# EAGLE board FAJAS_V3 (EAGLE 9.6.2)
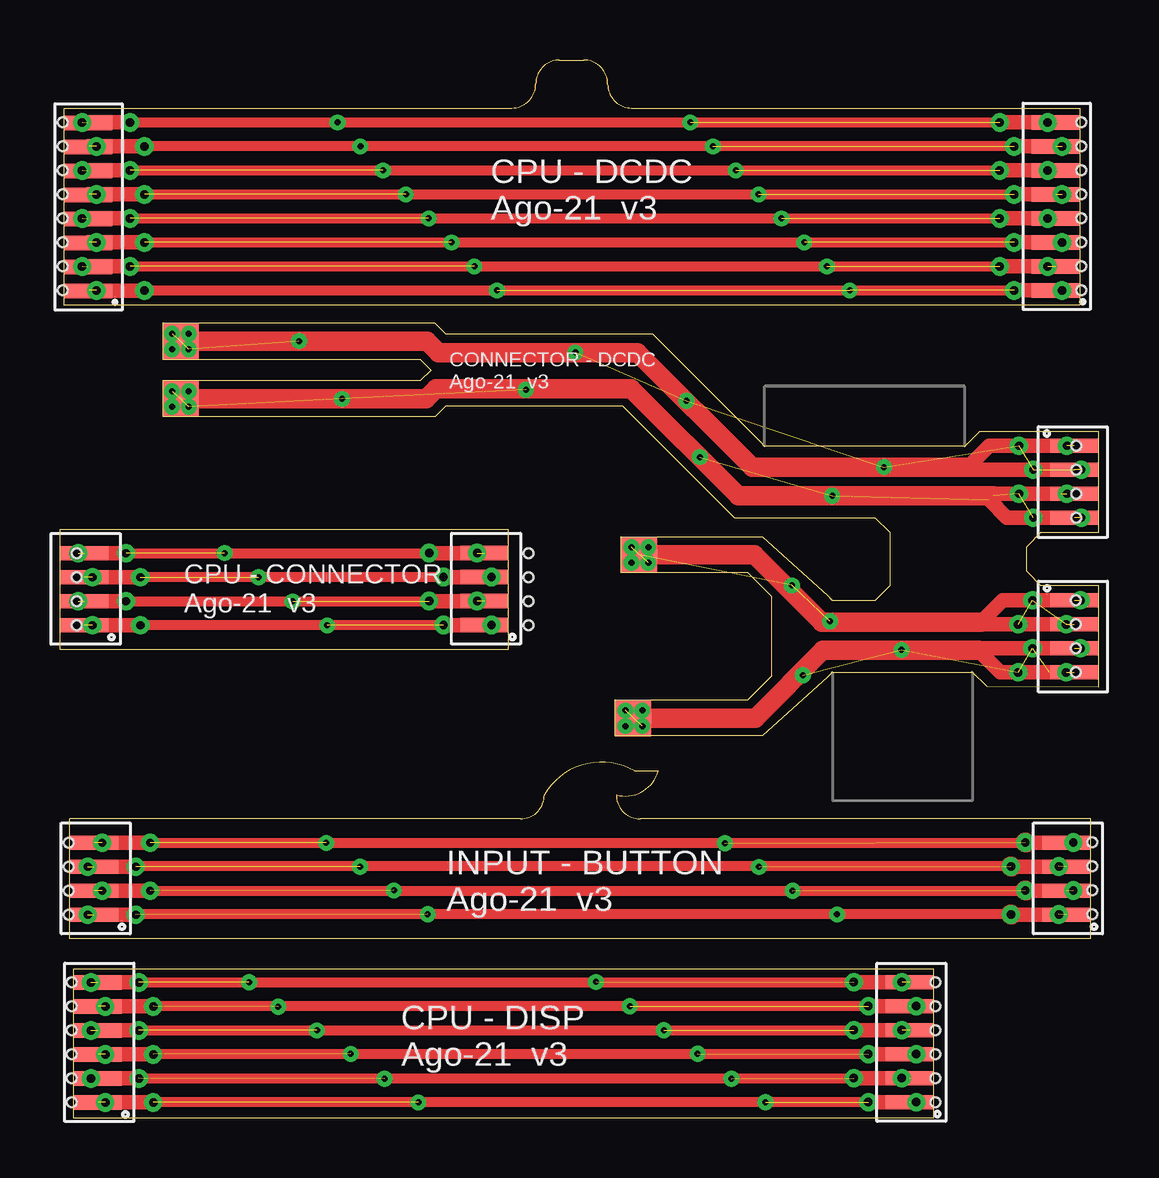
[diagram p0: board, top side]
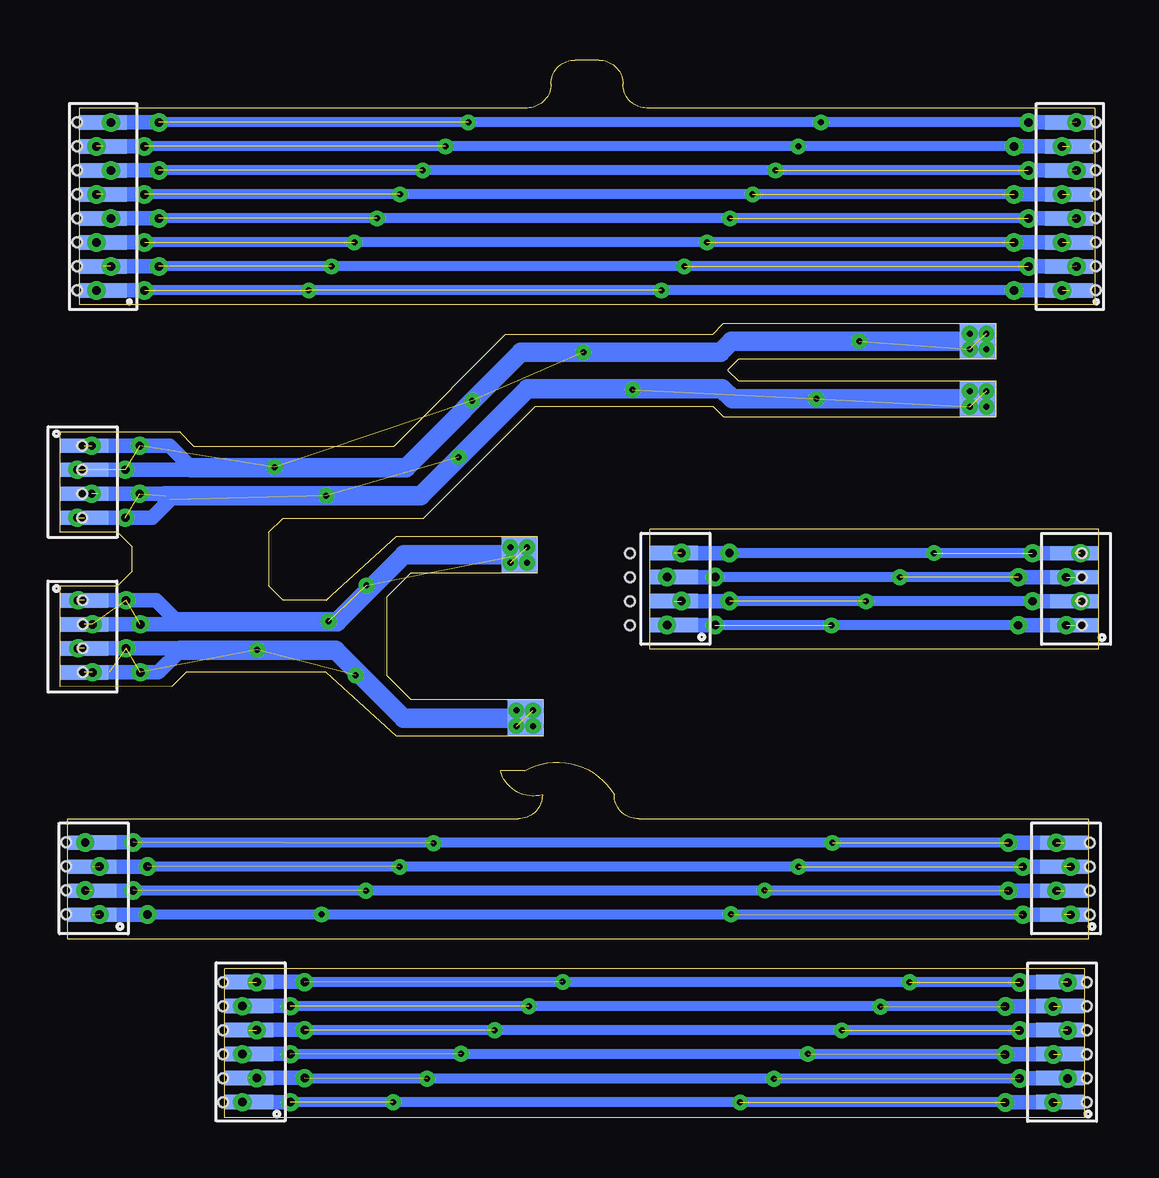
[diagram p1: board, bottom side, seen from below]

Size 43.3 x 44.07 mm. Coordinates in mm from the lower left corner, seen from the top.
Outline: 31.98,21.77 32.19,21.56
Outline: 32.19,21.56 33.99,21.56 34.59,22.16 34.59,24.39 33.99,24.99 28.13,24.99 23.47,29.65 16.08,29.65 15.63,29.2 4.28,29.2 4.28,30.7 15.01,30.7 15.46,31.15 15.01,31.6 4.28,31.6 4.28,33.1 15.63,33.1 16.08,32.65 24.71,32.65 29.23,28.13 29.37,27.99 37.71,27.99 38.31,28.59 43.29,28.59 43.29,24.39 40.89,24.39 40.29,23.79 40.29,22.76 40.89,22.16 43.29,22.16 43.29,17.96 38.62,17.97 38.02,18.57 32.19,18.56 31.98,18.35 29.29,15.91 23.13,15.91 23.13,17.41 28.67,17.41 29.67,18.41 29.67,21.71 28.67,22.71 23.38,22.71 23.38,24.21 29.29,24.21 31.98,21.77
Outline: 32.19,21.56 32.18,21.56 31.98,21.77
Outline: 42.97,7.45 42.97,12.45 24.19,12.45 arc-90 23.19,13.45 arc90 24.94,14.45 23.94,14.45 arc90 20.19,13.45 arc-90 19.19,12.45 0.41,12.45 0.41,7.45 42.97,7.45
Outline: 0,19.51 0,24.51 18.7,24.51 18.7,19.51 0,19.51
Outline: 0.16,33.87 42.5,33.87 42.5,42.07 23.83,42.07 arc-90 22.83,43.07 arc90 21.83,44.07 20.83,44.07 arc90 19.83,43.07 arc-90 18.83,42.07 0.16,42.07 0.16,33.87
Outline: 0.57,6.2 36.43,6.2 36.43,0 0.57,0 0.57,6.2
Copper layers (1*16): Top 0.035mm / dielectric 1.5mm / Bottom 0.035mm
Design rules "default *": minimum track width 6mil, minimum drill 0.25mm, track to track 10mil, track to pad 10mil, pad to pad 10mil, via to via 1mil, smd to smd 6mil, copper to edge 0mil, drill to drill 6mil, minimum pad ring 10mil, minimum via ring 8mil, stop-mask expansion 4mil, vias tented up to drill 50mil, thermal gap 10mil
Net classes: 1 power: width 0.178 mm; 2 gnd: width 0.305 mm, drill 0.483 mm, clearance 0.203 mm
Holes 0.4 mm at 0.7,23.52 0.7,22.52 0.7,21.52 0.7,20.52 0.12,41.47 0.12,40.47 0.12,39.47 0.12,38.47 0.12,37.47 0.12,36.47 0.12,35.47 0.12,34.47 42.57,38.47 42.57,39.47 42.57,40.47 42.57,41.47 42.57,34.47 42.57,35.47 42.57,36.47 42.57,37.47 42.34,21.56 42.34,20.56 42.34,19.56 42.34,18.56 42.37,25 42.37,26 42.37,27 42.37,28 43.04,11.47 43.04,10.47 43.04,9.47 43.04,8.47 0.36,8.46 0.36,9.46 0.36,10.46 0.36,11.46 0.49,5.64 0.49,4.64 0.49,3.64 0.49,2.64 0.49,1.64 0.49,0.64 36.49,0.65 36.49,1.65 36.49,2.65 36.49,3.65 36.49,4.65 36.49,5.65 19.54,20.53 19.54,21.53 19.54,22.53 19.54,23.53

## Footprints (pad centres in the part's own frame; a part is rotated, then mirrored left to right if it is on the bottom)
FLEX6 = smd 0.6 x 2: 1 -2.5,0.25; 2 -1.5,0.25; 3 -0.5,0.25; 4 0.5,0.25; 5 1.5,0.25; 6 2.5,0.25
FLEX4 = smd 0.6 x 2: 1 -3.77,1.52; 2 -2.77,1.52; 3 -1.77,1.52; 4 -0.77,1.52
TESTPAD_TP15SQ = smd 1.5 x 1.5: TP 0,0
FLEX8 = smd 0.6 x 2: 1 -3.5,0.25; 2 -2.5,0.25; 3 -1.5,0.25; 4 -0.5,0.25; 5 0.5,0.25; 6 1.5,0.25; 7 2.5,0.25; 8 3.5,0.25

## Placement (x,y rotation side)
DISP_CPU_1  DISP_CPU_1  [FLEX6]  35.67,3.15 90 top
DISP_CPU_2  DISP_CPU_2  [FLEX6]  1.83,3.14 90 top
DISP_CPU_3  DISP_CPU_2  [FLEX6]  1.34,3.15 90 bottom
DISP_CPU_4  DISP_CPU_1  [FLEX6]  35.16,3.16 90 bottom
FLX1  FLEX4  [FLEX4]  43.47,12.23 90 top
FLX2  FLEX4  [FLEX4]  43.8,24.23 270 bottom
FLX3  FLEX4  [FLEX4]  19.22,24.3 90 top
FLX4  FLEX4  [FLEX4]  40.77,24.23 270 top
FLX5  FLEX4  [FLEX4]  40.77,17.79 270 top
FLX6  FLEX4  [FLEX4]  2.95,12.23 90 top
FLX7  FLEX4  [FLEX4]  43.81,17.79 270 bottom
FLX8  FLEX4  [FLEX4]  40.43,12.23 90 bottom
FLX9  FLEX4  [FLEX4]  -0.1,12.23 90 bottom
FLX10  FLEX4  [FLEX4]  -0.52,24.29 90 bottom
FLX11  FLEX4  [FLEX4]  16.18,24.3 90 bottom
GND1  TESTPAD_TPSQTP15SQ  [TESTPAD_TP15SQ]  24.14,23.46 0 bottom
GND2  TESTPAD_TPSQTP15SQ  [TESTPAD_TP15SQ]  24.14,23.45 0 top
K1  FLEX_DCDC  [FLEX8]  0.97,37.97 90 bottom
K2  FLEX_DCDC  [FLEX8]  1.42,37.95 90 top
K3  FLEX_CONN  [FLEX4]  2.52,24.29 90 top
K4  FLEX8  [FLEX8]  41.77,37.97 90 top
K5  FLEX8  [FLEX8]  41.27,37.97 90 bottom
VO+  TESTPAD_TPSQTP15SQ  [TESTPAD_TP15SQ]  5.03,32.34 0 top
VO+1  TESTPAD_TPSQTP15SQ  [TESTPAD_TP15SQ]  5.03,32.35 0 bottom
VO-  TESTPAD_TPSQTP15SQ  [TESTPAD_TP15SQ]  5.03,29.95 0 top
VO-1  TESTPAD_TPSQTP15SQ  [TESTPAD_TP15SQ]  5.03,29.95 0 bottom
VSYS_IP  TESTPAD_TPSQTP15SQ  [TESTPAD_TP15SQ]  23.89,16.65 0 top
VSYS_IP1  TESTPAD_TPSQTP15SQ  [TESTPAD_TP15SQ]  23.89,16.65 0 bottom

## Library data of the parts
DISP_CPU_1-DISP_CPU_4 K1 K2 K4 K5 = Flex_Faja_connector
FLX1-FLX11 K3 = Flex4
GND1 GND2 VO+ VO+1 VO- VO-1 VSYS_IP VSYS_IP1 = BeagleBone_Blue_R3

## Nets
BUTTON-INPUT_1: FLX1.1 FLX6.1 FLX8.1 FLX9.1
BUTTON-INPUT_2: FLX1.2 FLX6.2 FLX8.2 FLX9.2
BUTTON-INPUT_3: FLX1.3 FLX6.3 FLX8.3 FLX9.3
BUTTON-INPUT_4: FLX1.4 FLX6.4 FLX8.4 FLX9.4
CPU-CONN_1: FLX3.1 FLX10.1 FLX11.1 K3.1
CPU-CONN_2: FLX3.2 FLX10.2 FLX11.2 K3.2
CPU-CONN_3: FLX3.3 FLX10.3 FLX11.3 K3.3
CPU-CONN_4: FLX3.4 FLX10.4 FLX11.4 K3.4
CPU-DCDC_1: K1.1 K2.1 K4.1 K5.1
CPU-DCDC_2: K1.2 K2.2 K4.2 K5.2
CPU-DCDC_3: K1.3 K2.3 K4.3 K5.3
CPU-DCDC_4: K1.4 K2.4 K4.4 K5.4
CPU-DCDC_5: K1.5 K2.5 K4.5 K5.5
CPU-DCDC_6: K1.6 K2.6 K4.6 K5.6
CPU-DCDC_7: K1.7 K2.7 K4.7 K5.7
CPU-DCDC_8: K1.8 K2.8 K4.8 K5.8
DSP-CPU_1: DISP_CPU_1.1 DISP_CPU_2.1 DISP_CPU_3.1 DISP_CPU_4.1
DSP-CPU_2: DISP_CPU_1.2 DISP_CPU_2.2 DISP_CPU_3.2 DISP_CPU_4.2
DSP-CPU_3: DISP_CPU_1.3 DISP_CPU_2.3 DISP_CPU_3.3 DISP_CPU_4.3
DSP-CPU_4: DISP_CPU_1.4 DISP_CPU_2.4 DISP_CPU_3.4 DISP_CPU_4.4
DSP-CPU_5: DISP_CPU_1.5 DISP_CPU_2.5 DISP_CPU_3.5 DISP_CPU_4.5
DSP-CPU_6: DISP_CPU_1.6 DISP_CPU_2.6 DISP_CPU_3.6 DISP_CPU_4.6
GND: FLX5.1 FLX5.2 FLX7.1 FLX7.2 GND1.TP GND2.TP
VOUT+: FLX2.1 FLX2.2 FLX4.1 FLX4.2 VO+1.TP VO+.TP
VOUT-: FLX2.3 FLX2.4 FLX4.3 FLX4.4 VO-1.TP VO-.TP
VSYS: FLX5.3 FLX5.4 FLX7.3 FLX7.4 VSYS_IP1.TP VSYS_IP.TP

## Tracks (layer width: path | path; a pad name or v marks a point on that pad's centre or on a via)
BUTTON-INPUT_1  (via drill 0.25, 0.35)  (3 unrouted)
  Top 0.406: v39.64,8.47 v32.39,8.47 v3.17,8.47 v3.16,8.46
  Top 0.61: FLX8.1 39.65,8.46 | FLX9.1 v3.16,8.46
  Top 0.813: 39.65,8.46 v39.64,8.47
  Bottom 0.406: v39.64,8.47 v32.39,8.47 v3.17,8.47 v3.16,8.46
  Bottom 0.61: FLX9.1 v3.16,8.46 | FLX8.1 v39.65,8.46 v39.64,8.47
  other vias: 41.64,8.47 1.16,8.46 15.33,8.48
BUTTON-INPUT_2  (via drill 0.25, 0.35)  (4 unrouted)
  Top 0.406: v3.76,9.46 v40.25,9.46 40.25,9.46
  Top 0.61: FLX8.2 40.25,9.46 | FLX9.2 v3.76,9.46
  Top 0.813: 40.25,9.46 v40.24,9.47
  Bottom 0.406: v3.76,9.46 v40.25,9.46
  Bottom 0.61: FLX9.2 v3.76,9.46 | FLX8.2 v40.25,9.46 v40.24,9.47
  other vias: 30.54,9.46 42.24,9.47 1.76,9.46 13.92,9.47
BUTTON-INPUT_3  (via drill 0.25, 0.35)  (4 unrouted)
  Top 0.406: v39.64,10.47 v3.17,10.47 v3.16,10.46
  Top 0.61: FLX8.3 39.65,10.46 | FLX9.3 v3.16,10.46
  Top 0.813: 39.65,10.46 v39.64,10.47
  Bottom 0.406: v39.64,10.47 v3.17,10.47 v3.16,10.46
  Bottom 0.61: FLX9.3 v3.16,10.46 | FLX8.3 v39.65,10.46 v39.64,10.47
  other vias: 41.64,10.47 1.16,10.46 29.13,10.45 12.51,10.46
BUTTON-INPUT_4  (via drill 0.25, 0.35)  (4 unrouted)
  Top 0.406: v3.76,11.46 v40.25,11.46 40.25,11.46
  Top 0.61: FLX8.4 40.25,11.46 | FLX9.4 v3.76,11.46
  Top 0.813: 40.25,11.46 v40.24,11.47
  Bottom 0.406: v3.76,11.46 v40.23,11.46 v40.24,11.47
  Bottom 0.61: FLX9.4 v3.76,11.46 | v40.24,11.47 v42.24,11.47
  other vias: 1.76,11.46 11.1,11.45 27.72,11.44
CPU-CONN_1  (via drill 0.25, 0.35)  (3 unrouted)
  Top 0.406: v15.99,20.53 3.36,20.53 v3.35,20.52
  Top 0.508: FLX10.1
  Top 0.61: FLX10.1 v3.35,20.52 | FLX11.1 v15.99,20.53
  Bottom 0.406: 3.39,20.52 FLX11.1
  Bottom 0.61: FLX10.1 3.39,20.52 | v15.99,20.53 v17.99,20.53
  other vias: 1.35,20.52 11.14,20.51
CPU-CONN_2  (via drill 0.25, 0.35)  (3 unrouted)
  Top 0.406: v2.75,21.52 15.38,21.52 v15.39,21.53
  Top 0.61: FLX10.2 v2.75,21.52 | FLX11.2 v15.39,21.53
  Bottom 0.406: 2.79,21.52 17.42,21.52 FLX11.2
  Bottom 0.61: FLX10.2 2.79,21.52 | v15.39,21.53 17.41,21.53 17.42,21.52
  other vias: 17.39,21.53 0.75,21.52 9.7,21.51
CPU-CONN_3  (via drill 0.25, 0.35)  (3 unrouted)
  Top 0.406: v15.99,22.53 3.36,22.53 v3.35,22.52
  Top 0.508: FLX10.3
  Top 0.61: FLX10.3 v3.35,22.52 | FLX11.3 v15.99,22.53
  Bottom 0.406: 3.47,22.52 FLX11.3
  Bottom 0.61: FLX10.3 3.47,22.52 | v15.99,22.53 v17.99,22.53
  other vias: 1.35,22.52 8.28,22.52
CPU-CONN_4  (via drill 0.25, 0.35)  (4 unrouted)
  Top 0.406: v2.75,23.52 15.38,23.52 v15.39,23.53
  Top 0.61: FLX10.4 v2.75,23.52 | v15.39,23.53 v17.39,23.53
  Bottom 0.406: v2.75,23.52 17.36,23.52 18.33,23.52 18.39,23.58
  Bottom 0.61: FLX10.4 v2.75,23.52 | v15.39,23.53 17.35,23.53 17.36,23.52
  other vias: 0.75,23.52 6.86,23.53
CPU-DCDC_1  (via drill 0.25, 0.35)  (3 unrouted)
  Top 0.406: 1.17,34.47 K2.1 | v3.52,34.47 v39.77,34.47
  Top 0.61: K2.1 3.52,34.45 v3.52,34.47 | v39.77,34.47 K5.1
  Bottom 0.406: K1.1 1.67,34.47 v39.77,34.47 v41.77,34.47
  Bottom 0.61: v3.52,34.47 1.67,34.47 | K5.1 v39.77,34.47
  other vias: 1.52,34.47 18.22,34.47 32.92,34.47
CPU-DCDC_2  (via drill 0.25, 0.35)  (5 unrouted)
  Top 0.406: 41.52,35.45 K5.2 | v2.92,35.47 39.62,35.47
  Top 0.61: K2.2 1.17,35.47 v2.92,35.47 | v39.17,35.47 39.62,35.47 v41.17,35.47
  Bottom 0.406: 2.97,35.47 v39.17,35.47
  Bottom 0.61: K1.2 2.97,35.47 | v39.17,35.47 v41.17,35.47
  other vias: 0.92,35.47 17.27,35.47 31.97,35.47
CPU-DCDC_3  (via drill 0.25, 0.35)  (3 unrouted)
  Top 0.406: 1.17,36.47 K2.3 | v3.52,36.47 v39.77,36.47
  Top 0.61: K2.3 1.17,36.47 v3.52,36.47 | v39.77,36.47 K5.3
  Bottom 0.406: K1.3 v39.77,36.47 v41.77,36.47
  Bottom 0.61: v3.52,36.47 K1.3 | K5.3 v39.77,36.47
  other vias: 1.52,36.47 16.32,36.47 31.02,36.47
CPU-DCDC_4  (via drill 0.25, 0.35)  (4 unrouted)
  Top 0.406: 41.52,37.45 K5.4 | v2.92,37.47 v39.17,37.47
  Top 0.61: K2.4 1.17,37.47 v2.92,37.47 | v39.17,37.47 v41.17,37.47
  Bottom 0.406: 3.07,37.47 v39.17,37.47 | 41.22,37.47 K5.4
  Bottom 0.61: K1.4 3.07,37.47 | v39.17,37.47 41.22,37.47
  other vias: 0.92,37.47 15.37,37.47 30.07,37.47
CPU-DCDC_5  (via drill 0.25, 0.35)  (4 unrouted)
  Top 0.406: 1.17,38.47 K2.5 | v3.52,38.47 v39.77,38.47
  Top 0.61: K2.5 1.17,38.47 v3.52,38.47 | v39.77,38.47 K5.5
  Bottom 0.406: K1.5 1.57,38.47 v39.77,38.47
  Bottom 0.61: v3.52,38.47 1.57,38.47 | K5.5 v39.77,38.47
  other vias: 1.52,38.47 41.77,38.47 14.42,38.47 29.12,38.47
CPU-DCDC_6  (via drill 0.25, 0.35)  (4 unrouted)
  Top 0.406: v2.92,39.47 39.52,39.47
  Top 0.61: K2.6 1.17,39.47 v2.92,39.47 | v39.17,39.47 39.52,39.47 v41.17,39.47
  Bottom 0.406: 2.97,39.47 v39.17,39.47 | 41.22,39.47 K5.6
  Bottom 0.61: K1.6 2.97,39.47 | v39.17,39.47 41.22,39.47
  other vias: 0.92,39.47 13.47,39.47 28.17,39.47
CPU-DCDC_7  (via drill 0.25, 0.35)  (3 unrouted)
  Top 0.406: 1.17,40.47 K2.7 | v3.52,40.47 v12.52,40.47 v39.77,40.47
  Top 0.61: K2.7 1.17,40.47 v3.52,40.47 | v39.77,40.47 K5.7
  Bottom 0.406: 3.62,40.47 v39.77,40.47
  Bottom 0.61: K1.7 3.62,40.47 | K5.7 v39.77,40.47
  other vias: 1.52,40.47 41.77,40.47 27.22,40.47
CPU-DCDC_8  (via drill 0.25, 0.35)  (3 unrouted)
  Top 0.406: 41.52,41.45 K5.8 | v2.92,41.47 v11.57,41.47 v39.17,41.47
  Top 0.61: K2.8 1.17,41.47 v2.92,41.47 | v39.17,41.47 v41.17,41.47
  Bottom 0.406: 2.97,41.47 v39.17,41.47 | 41.27,41.47 K5.8
  Bottom 0.61: K1.8 2.97,41.47 | v39.17,41.47 41.27,41.47
  other vias: 0.92,41.47 26.27,41.47
DSP-CPU_1  (via drill 0.25, 0.35)  (4 unrouted)
  Top 0.406: v33.69,0.65 3.91,0.65 v3.89,0.64
  Top 0.61: DISP_CPU_2.1 v3.89,0.64 | v33.69,0.65 v35.69,0.65
  Bottom 0.406: v3.89,0.64 33.68,0.64 v33.69,0.65
  Bottom 0.61: DISP_CPU_3.1 3.88,0.65 v3.89,0.64 | DISP_CPU_4.1 v33.69,0.65
  other vias: 1.89,0.64 14.94,0.64 29.4,0.65
DSP-CPU_2  (via drill 0.25, 0.35)  (3 unrouted)
  Top 0.406: v3.29,1.64 33.08,1.64 v33.09,1.65
  Top 0.61: DISP_CPU_2.2 v3.29,1.64 | v33.09,1.65 v35.09,1.65
  Bottom 0.406: v33.09,1.65 33.08,1.64 v1.29,1.64
  Bottom 0.61: DISP_CPU_3.2 3.28,1.65 v3.29,1.64 | DISP_CPU_4.2 v33.1,1.66 v33.09,1.65
  other vias: 27.99,1.63 13.53,1.62
DSP-CPU_3  (via drill 0.25, 0.35)  (4 unrouted)
  Top 0.406: v33.69,2.65 3.91,2.65 v3.89,2.64
  Top 0.61: DISP_CPU_2.3 v3.89,2.64 | v33.69,2.65 v35.69,2.65
  Bottom 0.406: v3.89,2.64 33.68,2.64 v33.7,2.66
  Bottom 0.61: DISP_CPU_3.3 3.88,2.65 v3.89,2.64 | DISP_CPU_4.3 v33.7,2.66 v33.69,2.65
  other vias: 1.89,2.64 12.12,2.66 26.58,2.67
DSP-CPU_4  (via drill 0.25, 0.35)  (4 unrouted)
  Top 0.406: v3.29,3.64 33.08,3.64 v33.09,3.65
  Top 0.61: DISP_CPU_2.4 v3.29,3.64 | v33.09,3.65 DISP_CPU_1.4
  Bottom 0.406: DISP_CPU_4.4 3.29,3.66 3.28,3.65
  Bottom 0.61: DISP_CPU_3.4 3.28,3.65 v3.29,3.64 | DISP_CPU_4.4 v33.1,3.66 v33.09,3.65
  other vias: 1.29,3.64 35.09,3.65 25.17,3.65 10.71,3.64
DSP-CPU_5  (via drill 0.25, 0.35)  (4 unrouted)
  Top 0.406: v33.69,4.65 3.6,4.65 3.58,4.64
  Top 0.61: DISP_CPU_2.5 3.58,4.64 v3.89,4.64 | v33.69,4.65 v35.69,4.65
  Bottom 0.406: v3.89,4.64 33.68,4.64 v33.7,4.66
  Bottom 0.61: DISP_CPU_3.5 3.88,4.65 v3.89,4.64 | DISP_CPU_4.5 v33.7,4.66 v33.69,4.65
  other vias: 1.89,4.64 9.1,4.63 23.75,4.65
DSP-CPU_6  (via drill 0.25, 0.35)  (4 unrouted)
  Top 0.406: v3.29,5.64 33.08,5.64 v33.09,5.65
  Top 0.61: DISP_CPU_2.6 v3.29,5.64 | v33.09,5.65 DISP_CPU_1.6
  Bottom 0.406: DISP_CPU_3.6 v33.09,5.65 v33.1,5.66
  Bottom 0.61: DISP_CPU_3.6 3.28,5.65 v3.29,5.64 | DISP_CPU_4.6 v33.1,5.66 v33.09,5.65
  other vias: 1.29,5.64 35.09,5.65 7.88,5.65 22.34,5.66
GND  (via drill 0.25, 0.35)  (7 unrouted)
  Top 0.61: FLX7.1 39.29,21.56 38.38,20.65 38.33,20.6 38.37,20.56 FLX7.2
  Top 0.813: GND1.TP 28.96,23.45 31.76,20.65 38.38,20.65
  Bottom 0.61: FLX7.1 39.28,21.56 38.39,20.67 38.5,20.56 FLX7.2
  Bottom 0.813: GND1.TP 28.96,23.46 31.75,20.67 38.39,20.67
  other vias: 42.54,21.56 40.54,21.56 41.94,20.56 39.94,20.56 30.51,22.18 32.1,20.69
VOUT+  (via drill 0.25, 0.35)  (11 unrouted)
  Top 0.61: FLX2.1 38.75,28 37.85,27.1 37.74,26.99 FLX2.2
  Top 0.813: VO+1.TP 15.31,32.34 15.77,31.88 24.08,31.88 28.86,27.1 37.85,27.1
  Bottom 0.61: FLX2.1 38.73,28 37.82,27.09 37.91,27 FLX2.2
  Bottom 0.813: VO+1.TP 15.3,32.35 15.76,31.89 24.07,31.89 28.87,27.09 37.82,27.09
  other vias: 4.67,32.67 5.37,32.02 41.97,28 39.97,28 42.57,27 40.57,27 9.97,32.36 21.48,31.89 26.11,29.87 34.35,27.11
VOUT+1  (via drill 0.25)
  other vias: 5.37,32.67
VOUT+2  (via drill 0.25)
  other vias: 4.67,32.02
VOUT+3  (via drill 0.25)  (1 unrouted)
  other vias: 23.82,23.77 24.52,23.12
VOUT+4  (via drill 0.25)
  other vias: 5.37,30.27
VOUT+5  (via drill 0.25)
  other vias: 4.67,29.62
VOUT+6  (via drill 0.25)
  other vias: 24.52,23.77
VOUT+7  (via drill 0.25)
  other vias: 23.82,23.12
VOUT+8  (via drill 0.25)  (1 unrouted)
  other vias: 23.57,16.97 24.27,16.32
VOUT+9  (via drill 0.25)
  other vias: 24.27,16.97
VOUT+10  (via drill 0.25)
  other vias: 23.57,16.32
VOUT-  (via drill 0.25, 0.35)  (11 unrouted)
  Top 0.508: FLX2.3 41.71,26 | 38.73,25.74 38.72,25.75
  Top 0.61: FLX2.3 38.99,26 38.9,25.91 38.73,25.74 39.47,25 FLX2.4
  Top 0.813: VO-1.TP 15.25,29.95 15.68,30.38 23.8,30.38 28.27,25.91 38.9,25.91
  Bottom 0.61: FLX2.3 38.46,26 | 38.46,26 37.84,26 37.75,25.91 | FLX2.4 39.46,25 38.46,26
  Bottom 0.813: VO-1.TP 15.26,29.95 15.69,30.38 23.8,30.38 28.27,25.91 37.75,25.91 38.91,25.91
  other vias: 4.67,30.27 5.37,29.62 41.97,26 39.97,26 42.57,25 40.57,25 32.19,25.92 26.68,27.53 19.42,30.33 11.76,29.95
VSYS  (via drill 0.25, 0.35)  (6 unrouted)
  Top 0.61: 41.25,18.56 FLX7.4 39.19,18.56 38.28,19.47 38.21,19.54 38.23,19.56 FLX7.3
  Top 0.813: VSYS_IP1.TP 28.98,16.65 31.8,19.47 38.28,19.47
  Bottom 0.61: FLX7.3 37.7,19.56 37.62,19.48 | FLX7.4 39.19,18.56 38.27,19.48
  Bottom 0.813: VSYS_IP1.TP 28.98,16.65 31.81,19.48 37.62,19.48 38.27,19.48
  other vias: 42.54,19.56 40.54,19.56 41.94,18.56 39.94,18.56 30.97,18.44 35.08,19.49

## Text on the board
tNames: CPU - DCDC / Ago-21 v3 | CONNECTOR - DCDC / Ago-21 v3 | CPU - CONNECTOR / Ago-21 v3 | INPUT - BUTTON / Ago-21 v3 | CPU - DISP / Ago-21 v3